# EAGLE board DeviceDummy (EAGLE 5.00)
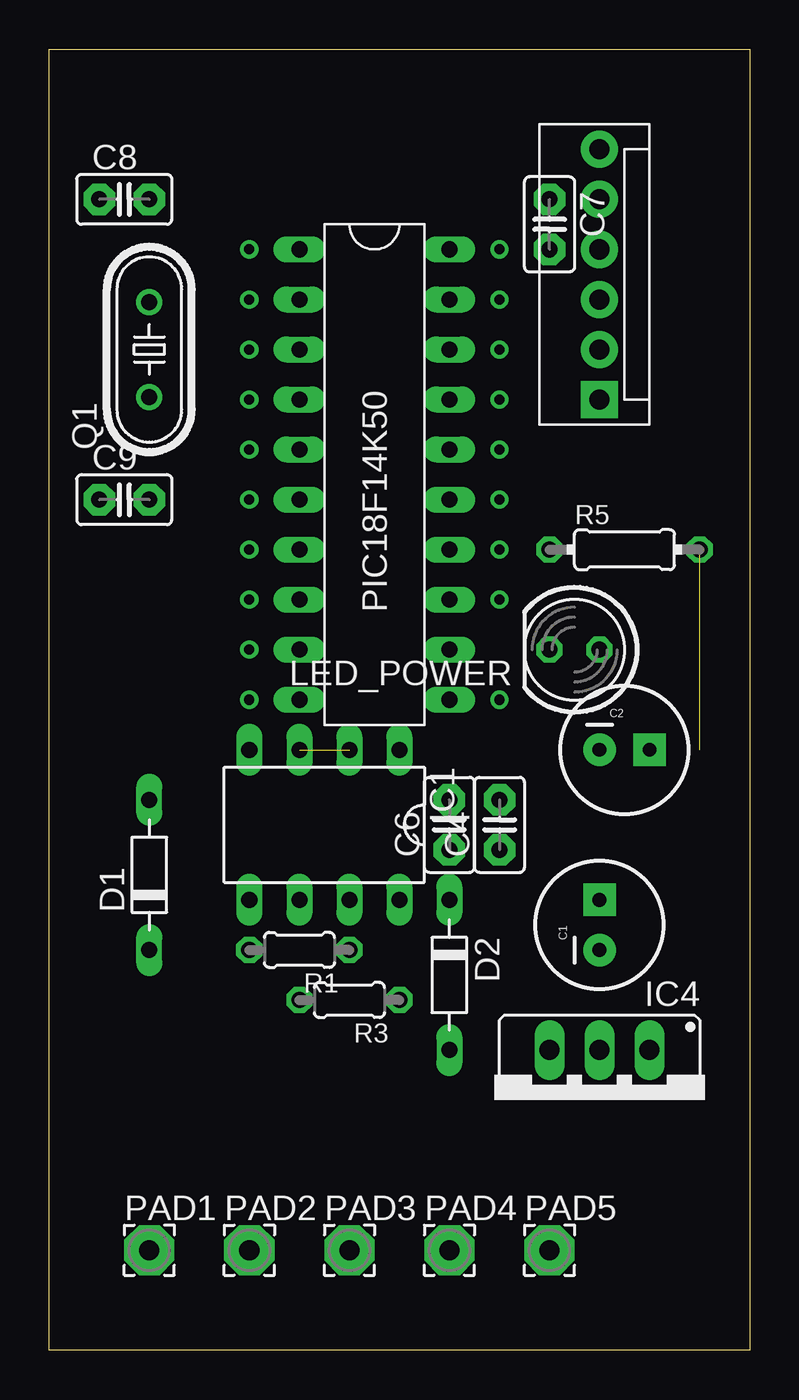
[diagram p0: board, top side]
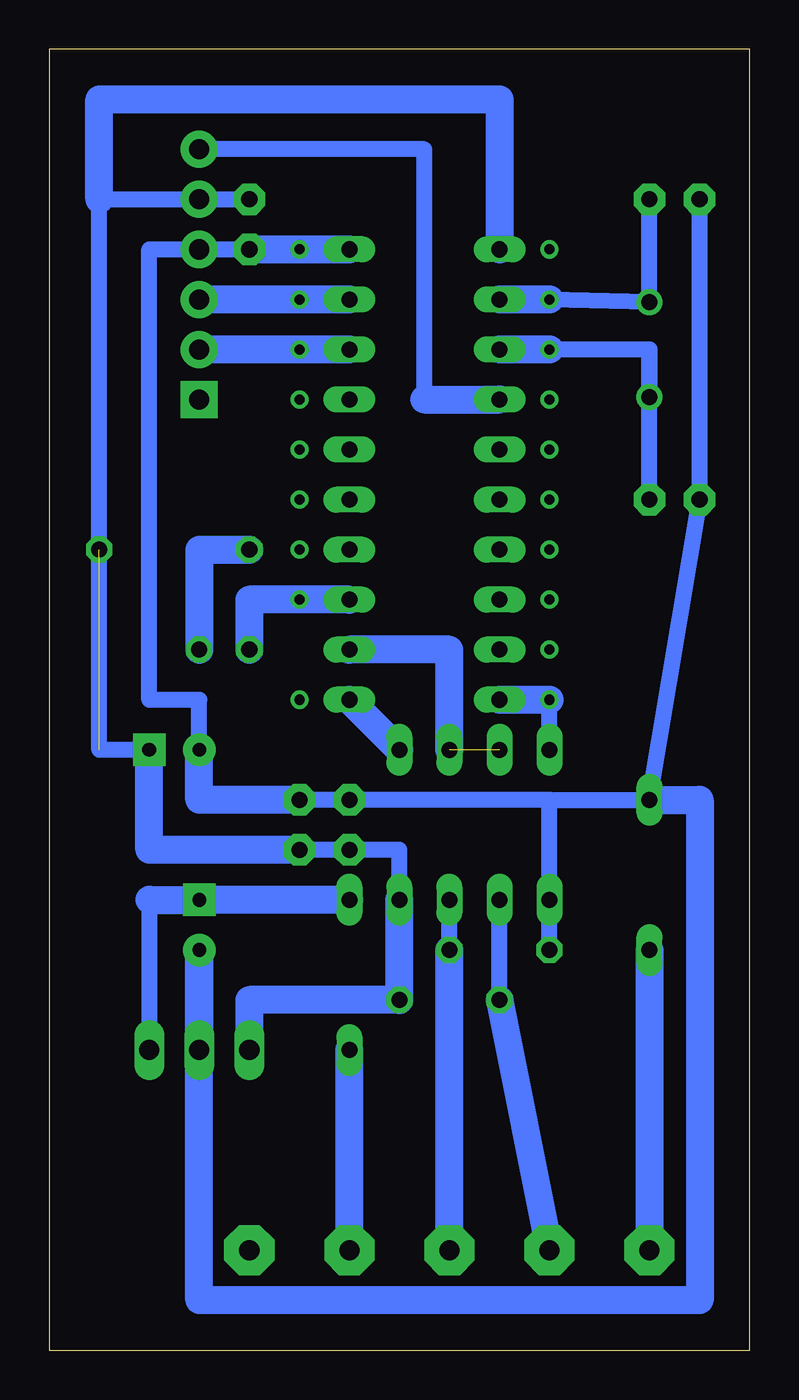
[diagram p1: board, bottom side, seen from below]

Size 35.56 x 66.04 mm. Coordinates in mm from the lower left corner, seen from the top.
Outline: 35.56,0 0,0 0,66.04 35.56,66.04 35.56,0
Copper layers (1*16): Top 0.035mm / dielectric 1.5mm / Bottom 0.035mm
Design rules "default": minimum track width 10mil, minimum drill 24mil, track to track 8mil, track to pad 8mil, pad to pad 8mil, via to via 8mil, smd to smd 8mil, copper to edge 40mil, drill to drill 8mil, minimum pad ring 10mil, minimum via ring 8mil, stop-mask expansion 4mil, vias tented up to drill 0mil, thermal gap 10mil

## Footprints (pad centres in the part's own frame; a part is rotated, then mirrored left to right if it is on the bottom)
CPOL-RADIAL-100UF-25V = drill 0.7 pad 1.651 square: 1 1.27,0 | drill 0.7 pad 1.651 round: 2 -1.27,0
C2.5-2 = drill 0.813 pad 1.6 octagon: 1 -1.27,0; 2 1.27,0
D-7.5 = drill 0.813 long: A 3.81,0; C -3.81,0
DIL08 = drill 0.813 long: 1 -3.81,-3.81; 2 -1.27,-3.81; 3 1.27,-3.81; 4 3.81,-3.81; 5 3.81,3.81; 6 1.27,3.81; 7 -1.27,3.81; 8 -3.81,3.81
78XXS = drill 1.016 long: GND 0,-2.54; IN -2.54,-2.54; OUT 2.54,-2.54
LED5MM = drill 0.813 octagon: A -1.27,0; K 1.27,0
2,54/1,0 = drill 1.016 pad 2.54 octagon: 1 0,0
HC49/S = drill 0.813 round: 1 -2.413,0; 2 2.413,0
0204/5 = drill 0.813 octagon: 1 -2.54,0; 2 2.54,0
0204/7 = drill 0.813 octagon: 1 -3.81,0; 2 3.81,0
PIC18F14K50-E/P = drill 0.813 long: 1 -5.08,12.7; 2 -5.08,10.16; 3 -5.08,7.62; 4 -5.08,5.08; 5 -5.08,2.54; 6 -5.08,0; 7 -5.08,-2.54; 8 -5.08,-5.08; 9 -5.08,-7.62; 10 -5.08,-10.16; 11 2.54,-10.16; 12 2.54,-7.62; 13 2.54,-5.08; 14 2.54,-2.54; 15 2.54,0; 16 2.54,2.54; 17 2.54,5.08; 18 2.54,7.62; 19 2.54,10.16; 20 2.54,12.7
MOLEX-1X6 = drill 1.016 pad 1.88 square: 1 0,0 | drill 1.016 pad 1.88 round: 2 2.54,0; 3 5.08,0; 4 7.62,0; 5 10.16,0; 6 12.7,0

## Placement (x,y rotation side)
C1  100uf ???  [CPOL-RADIAL-100UF-25V]  27.94,21.59 90 top
C2  10uf  [CPOL-RADIAL-100UF-25V]  29.21,30.48 0 top
C4  100nf  [C2.5-2]  22.86,26.67 90 top
C6  10nf  [C2.5-2]  20.32,26.67 90 top
C7  10nf  [C2.5-2]  25.4,57.15 270 top
C8  [C2.5-2]  3.81,58.42 0 top
C9  [C2.5-2]  3.81,43.18 0 top
D1  [D-7.5]  5.08,24.13 90 top
D2  [D-7.5]  20.32,19.05 270 top
IC1  LTC485N  [DIL08]  13.97,26.67 180 top
IC4  [78XXS]  27.94,12.7 180 top
LED_POWER  [LED5MM]  26.67,35.56 180 top
PAD1  [2,54/1,0]  5.08,5.08 0 top
PAD2  [2,54/1,0]  10.16,5.08 0 top
PAD3  [2,54/1,0]  15.24,5.08 0 top
PAD4  [2,54/1,0]  20.32,5.08 0 top
PAD5  [2,54/1,0]  25.4,5.08 0 top
Q1  [HC49/S]  5.08,50.8 90 top
R1  10K  [0204/5]  12.7,20.32 180 top
R3  10K  [0204/5]  15.24,17.78 180 top
R5  10K  [0204/7]  29.21,40.64 0 top
U$2  PIC18F14K50-E-P  [PIC18F14K50-E/P]  17.78,43.18 0 top
U$10  PIC-ICSPPTH  [MOLEX-1X6]  27.94,48.26 90 top

## Library data of the parts
C1 C2 U$10 = SparkFun
C4 C6-C9 = capacitor-wima
D1 D2 = diode
IC1 = linear-technology
IC4 = v-reg
LED_POWER = led
PAD1-PAD5 = wirepad
Q1 = crystal
R1 R3 R5 = resistor
U$2 = pic18f14k50

## Nets
5V: C2.1 C4.1 C6.1 C7.1 IC1.8 IC4.OUT R3.1 R5.2 U$2.1 U$10.5
GND: C1.2 C2.2 C4.2 C6.2 C7.2 C8.1 C9.1 D1.A IC1.5 IC4.GND R1.2 U$2.20 U$10.4
N$1: U$2.4 U$10.6
N$2: IC1.6 PAD2.1 R3.2
N$4: U$2.18 U$10.2
N$6: U$2.19 U$10.3
N$11: D1.C PAD1.1
N$22: D2.A PAD4.1
N$25: IC1.2 IC1.3 U$2.12
N$41: LED_POWER.K U$2.13
N$42: LED_POWER.A R5.1
N$46: C1.1 D2.C IC4.IN
N$49: IC1.4 U$2.10
N$50: IC1.7 PAD3.1 R1.1
N$51: IC1.1 U$2.11
N$52: C8.2 Q1.2 U$2.2
N$53: C9.2 Q1.1 U$2.3

## Tracks (layer width: path | path; a pad name or v marks a point on that pad's centre or on a via)
5V  (via drill 0.51)  (1 unrouted)
  Bottom 0.813: IC1.8 17.78,25.4 C6.1 C4.1 | C2.1 33.02,30.48 33.02,58.42 U$10.5 | U$10.5 C7.1 U$10.5
  Bottom 1.422: C4.1 30.48,25.4 C2.1 | IC4.OUT 25.4,17.78 R3.1 IC1.8 | U$2.1 12.7,63.5 33.02,63.5 33.02,58.42
  other vias: 17.78,17.78
GND
  Bottom 0.813: C8.1 C9.1 D1.A 10.16,27.94 | 10.16,27.94 IC1.5 R1.2 | 10.16,27.94 C6.2 C4.2 | C7.2 U$10.4 30.48,55.88 30.48,33.02 27.94,33.02 C2.2
  Bottom 1.422: IC4.GND C1.2 27.94,2.54 2.54,2.54 2.54,27.94 D1.A | C7.2 U$2.20 | C4.2 27.94,27.94 C2.2
N$1
  Bottom 0.813: 16.51,48.26 16.51,60.96 U$10.6
  Bottom 1.422: 16.51,48.26 U$2.4
N$2
  Bottom 0.813: R3.2 IC1.6
  Bottom 1.422: R3.2 PAD2.1
N$4  (via drill 0.51)
  Bottom 0.813: U$10.2 v22.86,50.8
  Bottom 1.422: U$2.18 U$10.2
N$5  (via drill 0.51)
  other vias: 22.86,55.88
N$6  (via drill 0.51)
  Bottom 0.813: U$10.3 v22.86,53.34
  Bottom 1.422: U$2.19 U$10.3
N$7  (via drill 0.51)
  other vias: 22.86,48.26
N$8  (via drill 0.51)
  other vias: 22.86,45.72
N$9  (via drill 0.51)
  other vias: 22.86,43.18
N$10  (via drill 0.51)
  other vias: 22.86,40.64
N$11
  Bottom 1.422: D1.C PAD1.1
N$12  (via drill 0.51)
  other vias: 22.86,38.1
N$13  (via drill 0.51)
  other vias: 22.86,33.02
N$14  (via drill 0.51)
  other vias: 10.16,33.02
N$15  (via drill 0.51)
  other vias: 10.16,35.56
N$16  (via drill 0.51)
  other vias: 10.16,38.1
N$17  (via drill 0.51)
  other vias: 10.16,40.64
N$18  (via drill 0.51)
  other vias: 10.16,43.18
N$19  (via drill 0.51)
  other vias: 10.16,45.72
N$20  (via drill 0.51)
  other vias: 10.16,48.26
N$21  (via drill 0.51)
  other vias: 10.16,55.88
N$22
  Bottom 1.422: PAD4.1 D2.A
N$25  (1 unrouted)
  Bottom 1.422: IC1.2 15.24,35.56 U$2.12
N$41
  Bottom 1.422: U$2.13 25.4,38.1 LED_POWER.K
N$42
  Bottom 1.422: LED_POWER.A 27.94,40.64 R5.1
N$46
  Bottom 0.813: C1.1 30.48,22.86 IC4.IN
  Bottom 1.422: D2.C C1.1 30.48,22.86
N$49
  Bottom 0.813: IC1.4 10.16,33.02
  Bottom 1.422: 10.16,33.02 U$2.10
N$50
  Bottom 0.813: R1.1 IC1.7
  Bottom 1.422: PAD3.1 R1.1
N$51
  Bottom 1.422: IC1.1 U$2.11
N$52  (via drill 0.51)
  Bottom 0.813: v10.16,53.34 Q1.2 C8.2
  Bottom 1.422: v10.16,53.34 U$2.2
N$53  (via drill 0.51)
  Bottom 0.813: C9.2 5.08,50.8 | 5.08,50.8 Q1.1 | 5.08,50.8 v10.16,50.8
  Bottom 1.422: v10.16,50.8 U$2.3